# Altium PCB PT-MIS-PCB-004_v1.PcbDoc
Units mil, origin at the board's own origin, x right, y up, seen from the top; angles counter-clockwise.
Board outline 4318.93 x 4318.93 mil, 2 copper layers (Top Layer, Bottom Layer); 68 components, 28 nets, 205 pads, 82 vias.
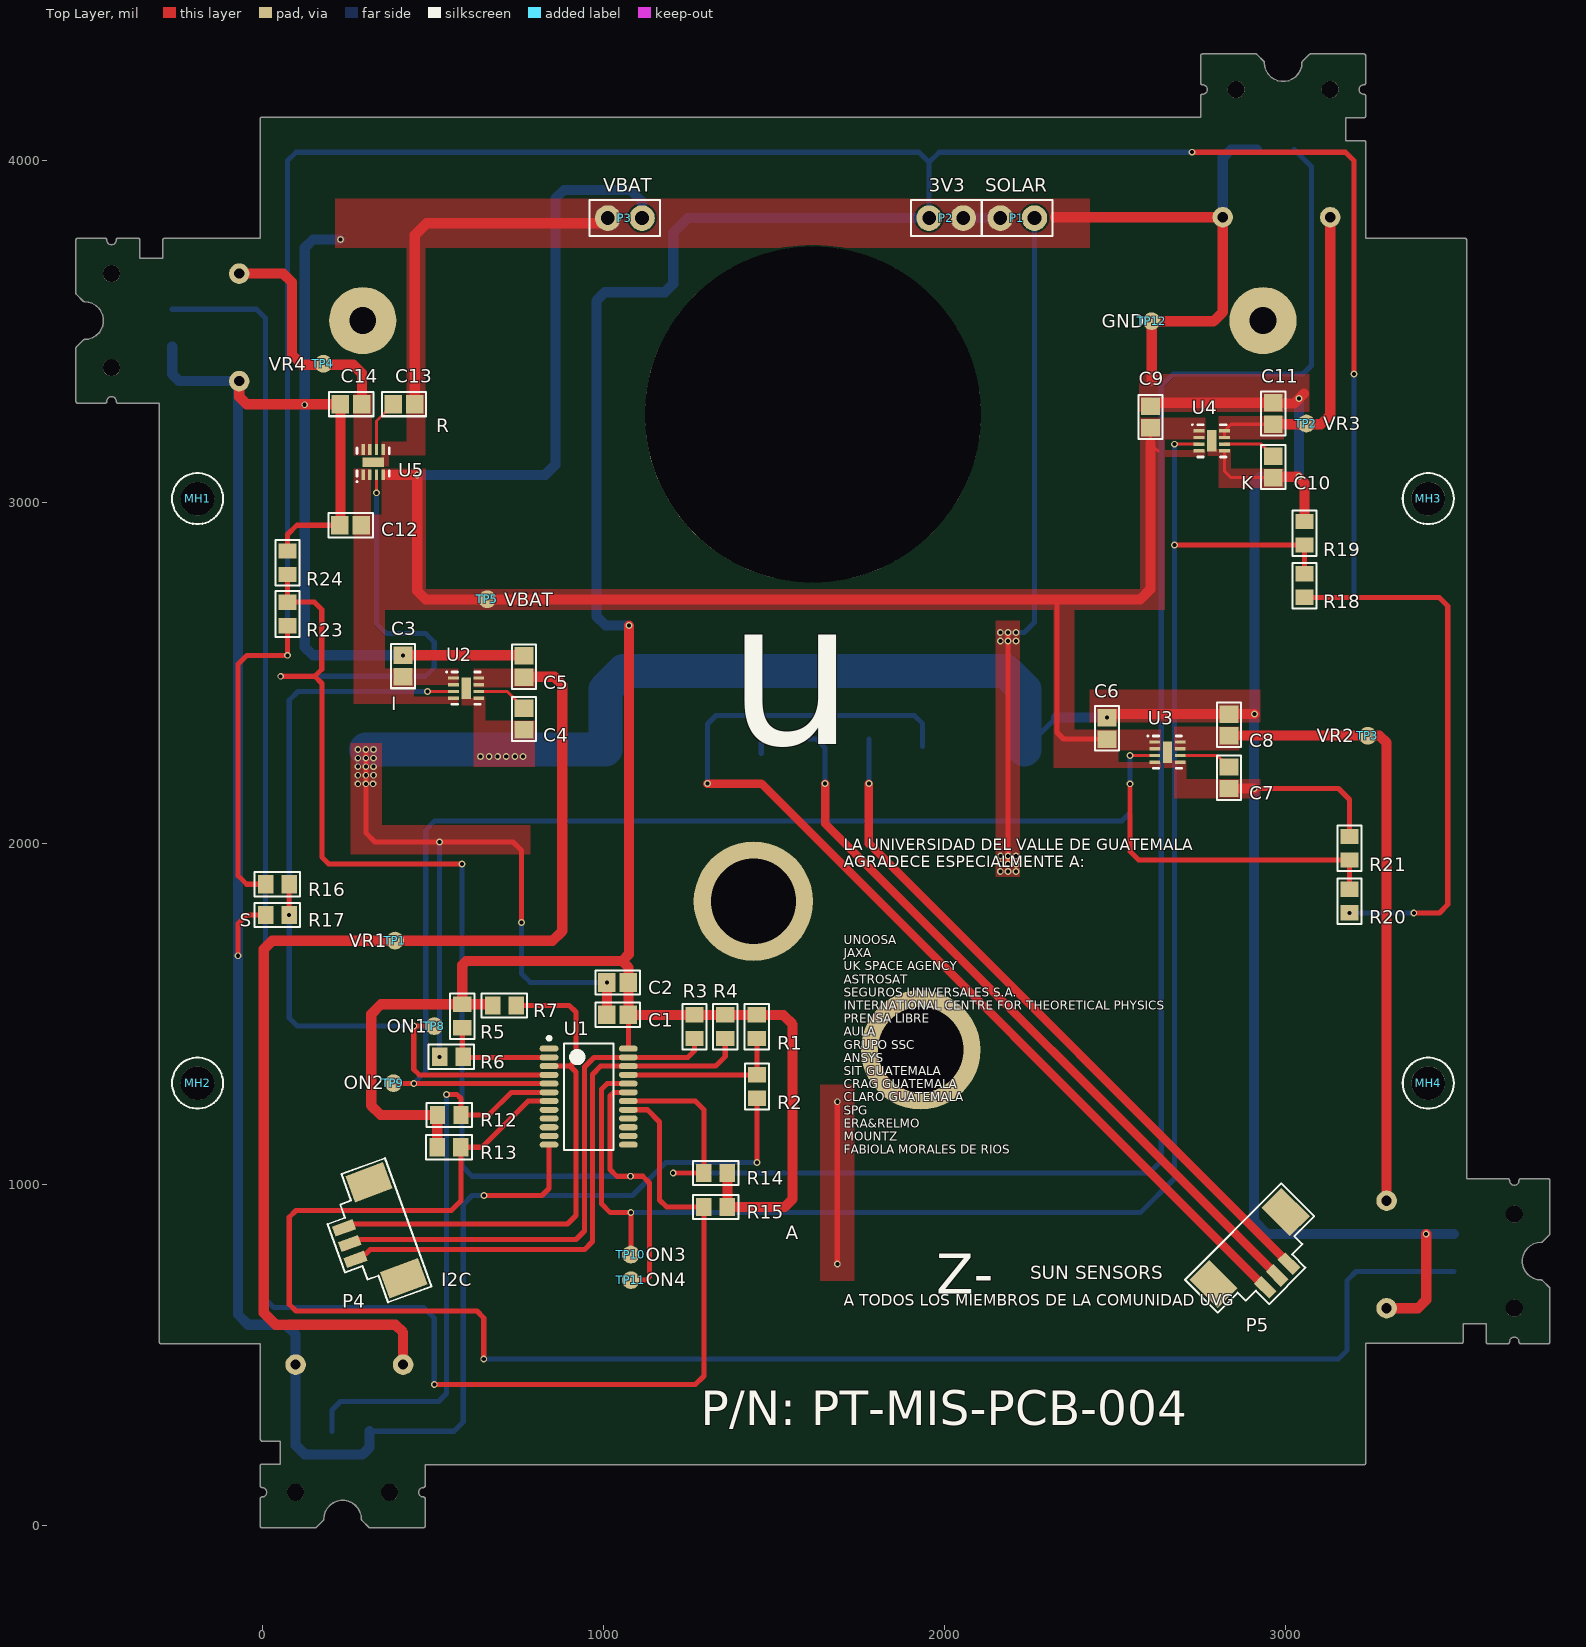
[diagram p0: Top Layer view]
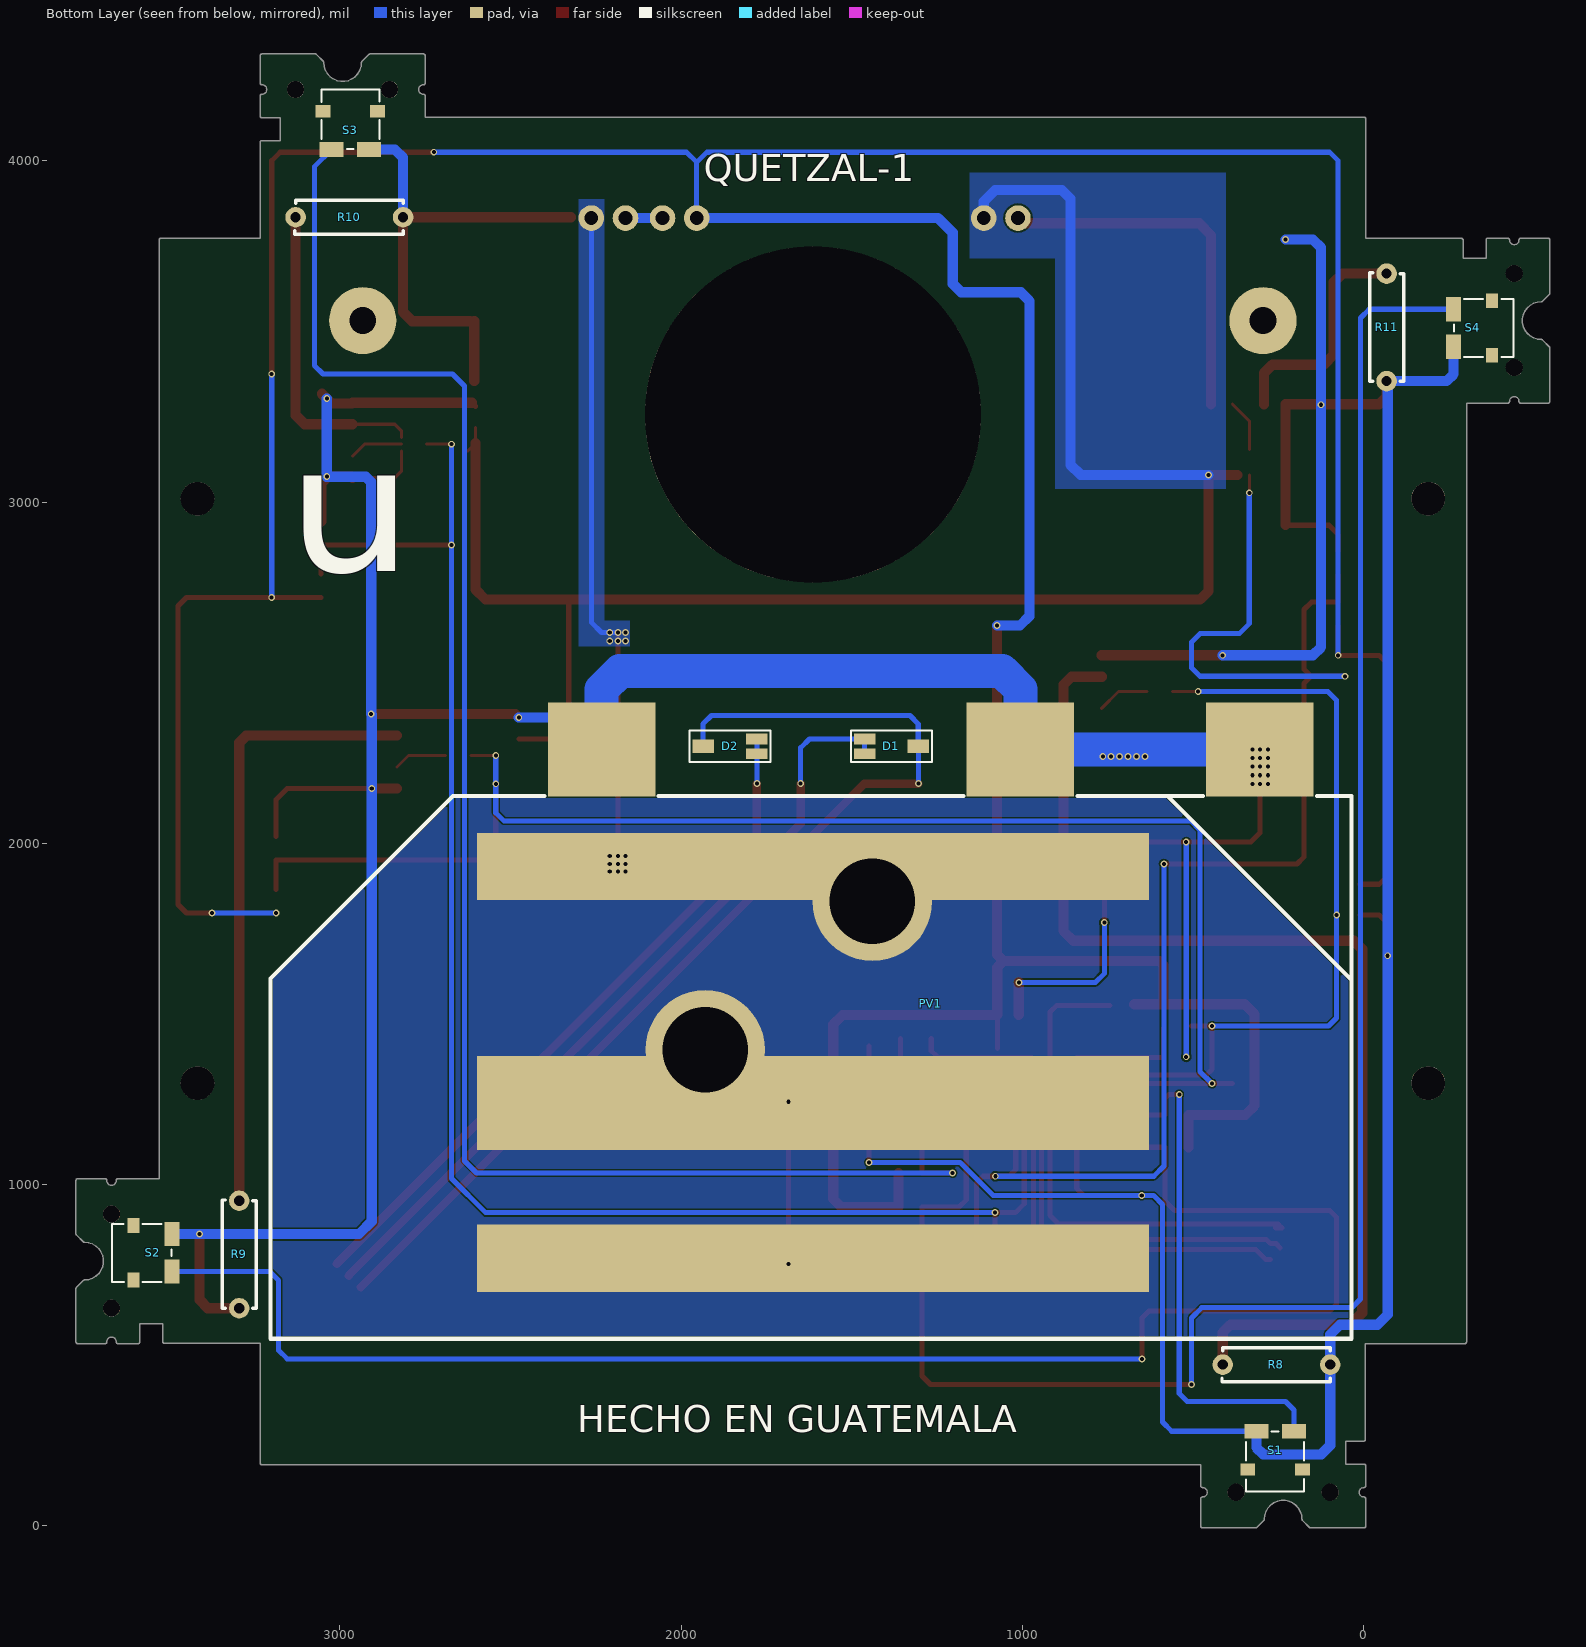
[diagram p1: Bottom Layer view, seen from below]
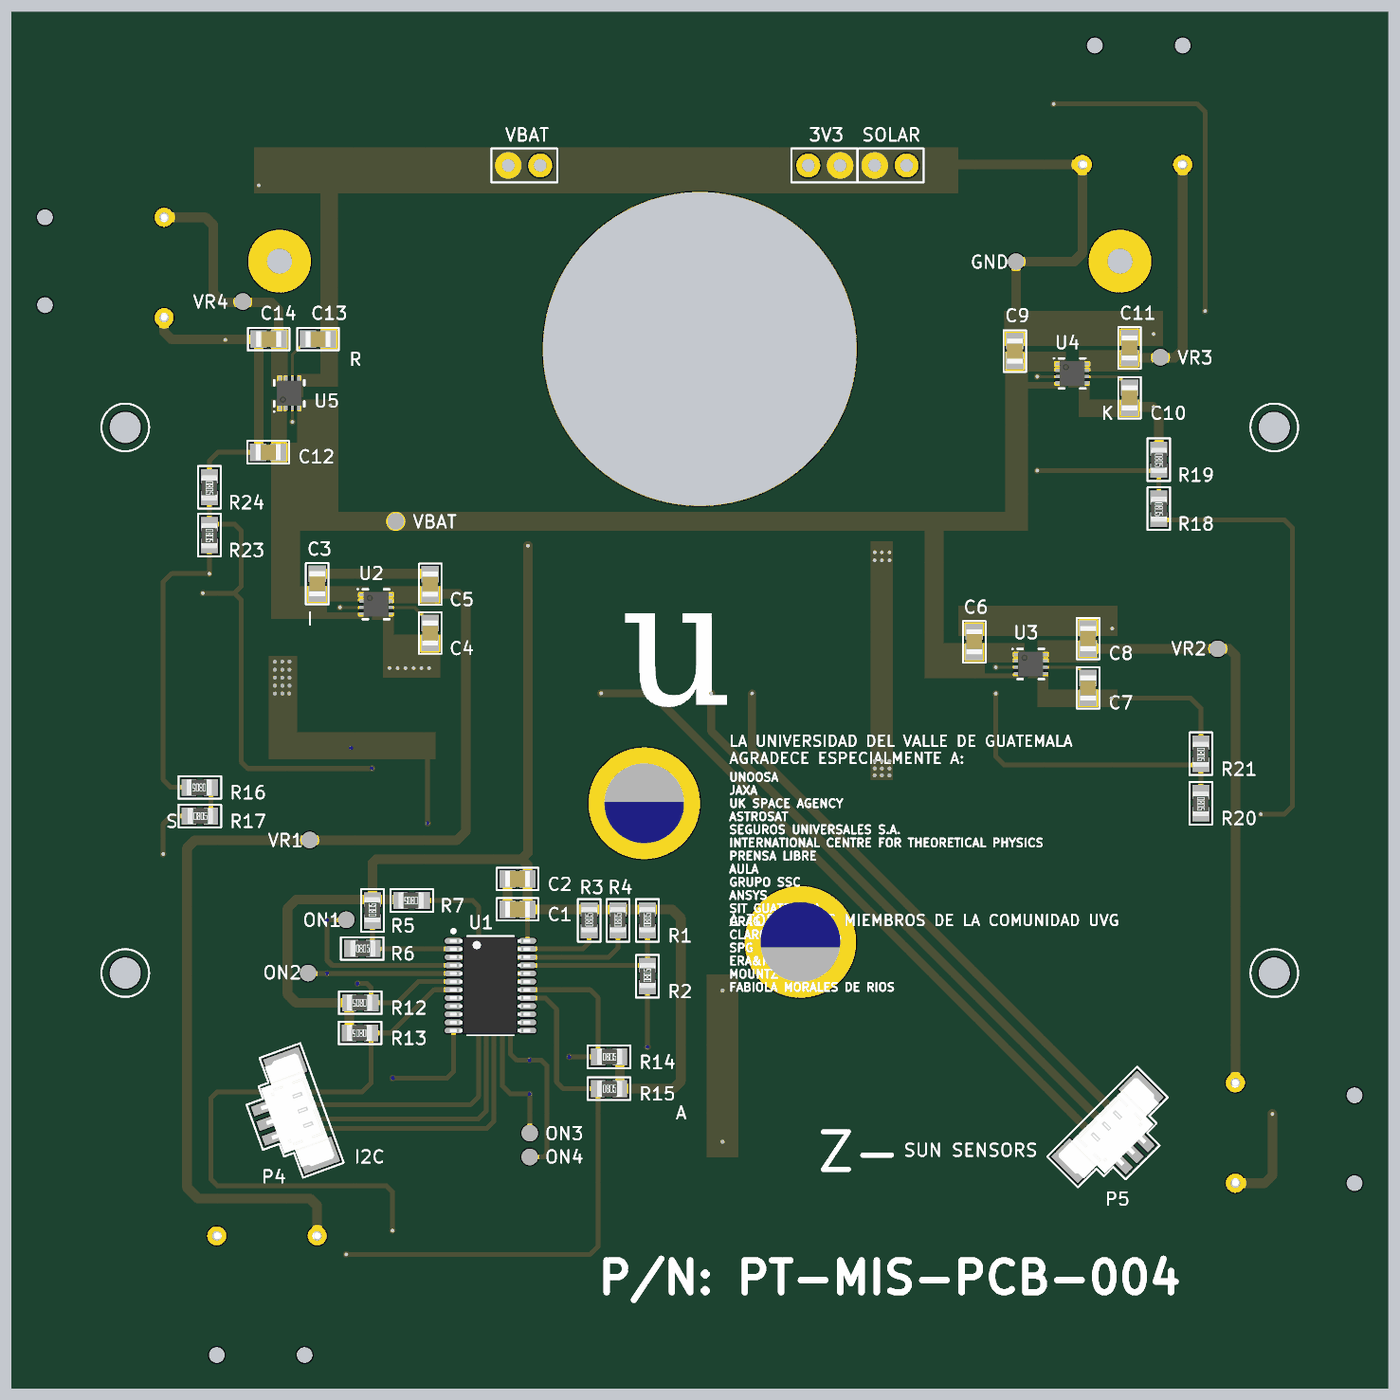
[diagram p2: 3D render of the assembled board from above, using the file's embedded part models]
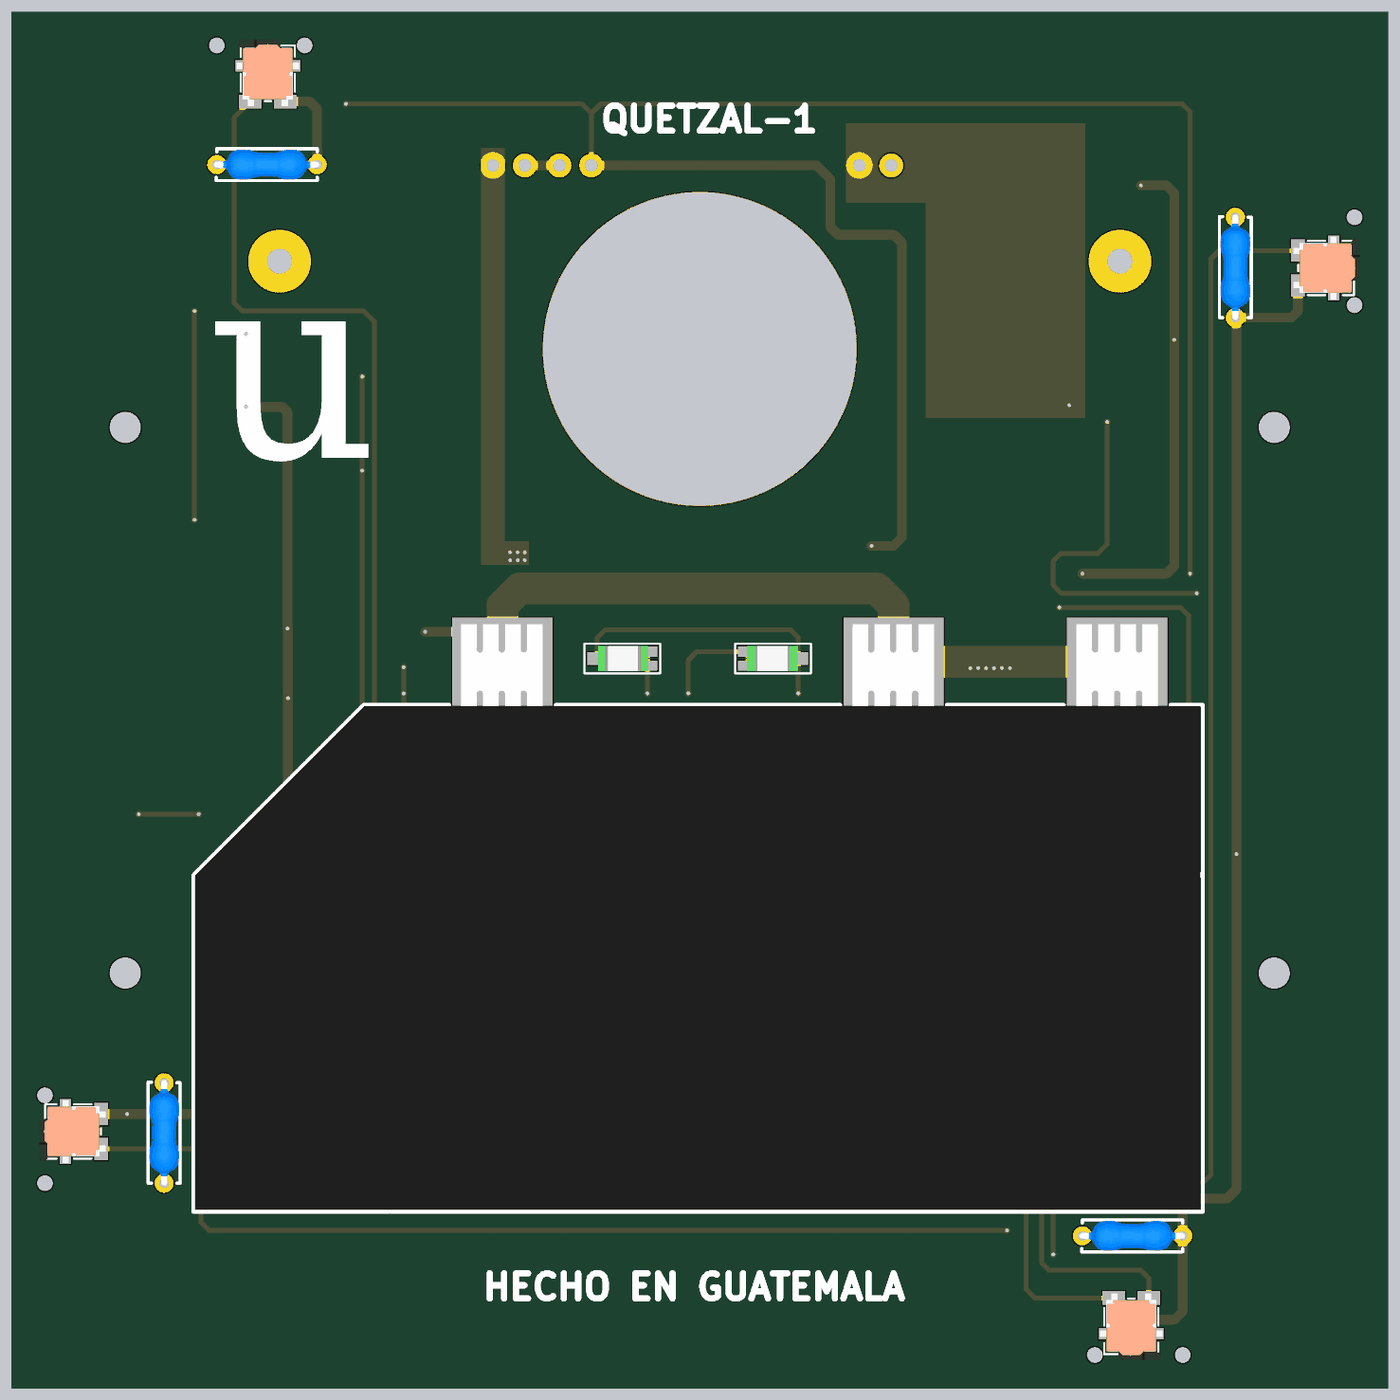
[diagram p3: 3D render of the assembled board from below, using the file's embedded part models]

## Layer stack, top to bottom
Top Solder: solder mask 0.4, Solder Resist, Dk 3.5
Top Layer: signal copper 1.4
Dielectric 1: dielectric 12.6, FR-4, Dk 4.8
Bottom Layer: signal copper 1.4
Bottom Solder: solder mask 0.4, Solder Resist, Dk 3.5

## Board outline
329 vertices, not listed, extent -545.29,-5.92 3773.64,4313.01

## Design rules (kind name [scope] priority, off if disabled: settings)
Clearance [All] p1: gap=5 ignorepadtopadclearanceinfootprint=FALSE
ComponentClearance [All] p1: gap=0 collisioncheckmode=3 verticalgap=0 showdistances=FALSE
HoleSize [All] p1: absolutevalues=TRUE maxlimit=984.25 minlimit=1 maxpercent=80.000 minpercent=20.000
HoleToHoleClearance [All] p1: gap=7.87 allowstackedmicrovias=TRUE
PlaneConnect [All] p1: planeconnectstyle=Direct reliefexpansion=20 reliefentries=4 reliefconductorwidth=10 reliefairgap=10
PolygonConnect [All] p1: connectstyle=Direct reliefconductorwidth=10 reliefentries=4 polygonreliefangle="90 Angle" airgapwidth=10
RoutingVias [All] p1: holewidth=28 width=50 viastyle="Through Hole" minholewidth=28 minwidth=50 maxholewidth=28 maxwidth=50
SolderMaskExpansion [All] p1: expansion=4
Width [All] p1: maxlimit=100 minlimit=5 preferedwidth=15
26 further rules are at their usual default settings.

## Components (designator, comment, footprint, x,y, rotation, side; value= is the part's Value field where it differs from the comment)
C1 "0.1µF" "CAP 0805/2012" 1042.22,1497.54 r0 top
C2 "LMK212BJ106KG-T" "CAP 0805/2012" 1042.22,1592.54 r0 top
C3 "LMK212BJ106KG-T" "CAP 0805/2012" 413.39,2519.29 r270 top
C4 "LMK212BJ106KG-T" "CAP 0805/2012" 768.07,2364.29 r270 top
C5 "GRM21BR61E226ME44L" "CAP 0805/2012" 768.07,2517.72 r270 top
C6 "LMK212BJ106KG-T" "CAP 0805/2012" 2475.85,2337.05 r270 top
C7 "LMK212BJ106KG-T" "CAP 0805/2012" 2833.07,2192.05 r270 top
C8 "GRM21BR61E226ME44L" "CAP 0805/2012" 2833.07,2347.05 r270 top
C9 "LMK212BJ106KG-T" "CAP 0805/2012" 2603.07,3249.29 r270 top
C10 "LMK212BJ106KG-T" "CAP 0805/2012" 2963.07,3102.8 r270 top
C11 "GRM21BR61E226ME44L" "CAP 0805/2012" 2963.07,3259.29 r270 top
C12 "LMK212BJ106KG-T" "CAP 0805/2012" 259.61,2932.09 r0 top
C13 "LMK212BJ106KG-T" "CAP 0805/2012" 416.1,3286.77 r0 top
C14 "GRM21BR61E226ME44L" "CAP 0805/2012" 261.1,3286.77 r0 top
D1 "TEMD6010FX01" TEMD6010FX01 1383.07,2284.29 r180 bottom
D2 "TEMD6010FX01" TEMD6010FX01 1858.07,2284.29 r0 bottom
MH1 "MH_3.8MMNC_2.5MMD" MH_3.8MMNC_2.5MMD_NON_COPPER_NPTH -188.98,3009.84 r0 top
MH2 "MH_3.8MMNC_2.5MMD" MH_3.8MMNC_2.5MMD_NON_COPPER_NPTH -188.98,1297.24 r0 top
MH3 "MH_3.8MMNC_2.5MMD" MH_3.8MMNC_2.5MMD_NON_COPPER_NPTH 3417.32,3009.84 r0 top
MH4 "MH_3.8MMNC_2.5MMD" MH_3.8MMNC_2.5MMD_NON_COPPER_NPTH 3417.32,1297.24 r0 top
P1 "61300211121" 61300211121 2213.35,3832.05 r180 top
P2 "61300211121" 61300211121 2004.72,3832.05 r0 top
P3 "61300211121" 61300211121 1063.35,3832.05 r180 top
P4 "0533980371" 0533980371 310.98,846.65 r110 top
P5 "0533980371" 0533980371 2934.17,773.82 r225 top
PV1 "AZUR SPACE 3G30A" "AZUR SPACE 3G30A" 1614.17,1239.37 r180 bottom
R1 "0" "RES 0805/2012" 1449.55,1462.56 r90 top
R2 "0" "RES 0805/2012" 1450,1287.52 r90 top
R3 "10K" "RES 0805/2012" 1267.22,1462.54 r90 top
R4 "10K" "RES 0805/2012" 1357.22,1462.54 r90 top
R5 "0" "RES 0805/2012" 586.83,1493.64 r90 top
R6 "0" "RES 0805/2012" 554.72,1374.37 r0 top
R7 "10K" "RES 0805/2012" 710,1525.04 r180 top
R8 "5.6" MFR50SFTE52-5R6 98.42,472.44 r0 bottom
R9 "5.6" MFR50SFTE52-5R6 3295.28,637.8 r90 bottom
R10 "5.6" MFR50SFTE52-5R6 2814.96,3834.65 r0 bottom
R11 "5.6" MFR50SFTE52-5R6 -66.93,3354.33 r90 bottom
R12 "10K" "RES 0805/2012" 548.62,1204.29 r180 top
R13 "10K" "RES 0805/2012" 548.07,1109.29 r180 top
R14 "10K" "RES 0805/2012" 1329.29,1034.29 r0 top
R15 "10K" "RES 0805/2012" 1329.29,934.29 r0 top
R16 "10K" "RES 0805/2012" 45,1880 r180 top
R17 "10K" "RES 0805/2012" 45,1790 r0 top
R18 "10K" "RES 0805/2012" 3055,2755 r270 top
R19 "10K" "RES 0805/2012" 3055,2908.52 r270 top
R20 "10K" "RES 0805/2012" 3186.85,1830.55 r270 top
R21 "10K" "RES 0805/2012" 3186.85,1985.55 r270 top
R23 "10K" "RES 0805/2012" 75,2672.09 r270 top
R24 "10K" "RES 0805/2012" 75,2822.09 r270 top
S1 "ESE-18L11C" ESE-18L11C 259.72,221.14 r0 bottom
S2 "ESE-18L11C" ESE-18L11C 3548.62,800.04 r90 bottom
S3 "ESE-18L11C" ESE-18L11C 2969.72,4088.94 r180 bottom
S4 "ESE-18L11C" ESE-18L11C -319.17,3510.04 r270 bottom
TP1 "Testpoint" Testpoint#1 390,1715 r0 top
TP2 "Testpoint" Testpoint#1 3060,3230 r90 top
TP3 "Testpoint" Testpoint#1 3240,2315 r90 top
TP4 "Testpoint" Testpoint#1 180,3405 r90 top
TP5 "Testpoint" Testpoint#1 660,2715 r90 top
TP8 "ON_1" Testpoint#2 105.28,2444.92 r90 top
TP9 "ON_2" Testpoint#1 385,1297.24 r90 top
TP10 "ON_3" Testpoint#1 1080.63,795 r90 top
TP11 "ON_4" Testpoint#3 1079.72,720 r90 top
TP12 "GND" Testpoint#1 2606.78,3530 r90 top
U1 "TCA9539QPWRQ1" TSOP65P640X120-24N 957.22,1257.54 r0 top
U2 "TPS22965TDSGRQ1" SON50P200X80_HS-9N 598.07,2454.76 r0 top
U3 "TPS22965TDSGRQ1" SON50P200X80_HS-9N 2653.07,2267.2 r0 top
U4 "TPS22965TDSGRQ1" SON50P200X80_HS-9N 2783.07,3179.29 r0 top
U5 "TPS22965TDSGRQ1" SON50P200X80_HS-9N 325.63,3116.77 r90 top

## Footprints (in the part's own frame and the unit in brackets; to place one, negate y for a bottom-side part, rotate by r counter-clockwise, add the part's x,y. Pads: shape width x height; smd on the part's side, far side on the other; paste and mask are expansions set on the pad)
0533980371 [mm] "CONN HEADER 3POS 1.25MM VERT SMD"
  rect 2.1x3 smd: 0(-3.8,-1.45) 0(3.8,-1.45)
  rect 0.8x1.6 smd: 1(-1.25,1.45) 2(0,1.45) 3(1.25,1.45)
  silkscreen extent -5.07,-3.18 5.07,2.53, body extent -4.45,-2.68 4.45,1.52, height 4.68
61300211121 [mil] "CONN HEADER 2 POS 2.54"
  round 75 hole 40: 1(-50,0) 2(50,0)
  silkscreen extent -103,-53 103,53
"AZUR SPACE 3G30A" [mm] "30% Triple Junction GaAs Solar Cell Assembly"
  rect 50x5 smd: 1(0,-11.557) 1(0,17.602)
  rect 50x7 smd: 1(0,0)
  rect 8x7 smd: 2(-15.727,26.297) 2(15.448,26.297) 3(33.273,26.297)
  silkscreen extent -40.38,-17.55 40.1,22.85, body extent -40.25,-17.41 39.9,29.27, height 0.31
"CAP 0805/2012" [mm]
  rect 1.3x1.4 smd: 1(-0.8,0) 2(0.8,0)
  silkscreen extent -1.65,-0.9 1.65,0.9, body extent -1,-0.64 1,0.64, height 1.26
ESE-18L11C [mm]
  rect 1.8x1.1 smd: 1(-1.397,-1.425) 2(1.397,-1.425)
  rect 1.1x0.9 smd: 3(-2.032,1.425) 4(2.032,1.425)
  silkscreen extent -2.16,-1.4 2.16,3.05, body extent -2.5,-1.78 2.5,3.52, height 1.26
MFR50SFTE52-5R6 [mil]
  round 60 hole 30: 1(0,0) 2(314.96,0)
  silkscreen extent 0,-50 317,50, body extent -10,-47 327,47, height 87
MH_3.8MMNC_2.5MMD_NON_COPPER_NPTH [mm] "Mounting Hole 3.8mm Diameter (Non Copper), 2.5mm Drill NPTH"
  round 2.5 hole 2.5 unplated: 1(0,0)
  silkscreen extent -1.9,-1.9 1.9,1.9
"RES 0805/2012" [mm]
  rect 1.15x1.35 smd: 1(-0.875,0) 2(0.875,0)
  silkscreen extent -1.7,-0.9 1.7,0.9, body extent -0.95,-0.62 1.05,0.63, height 0.6
SON50P200X80_HS-9N [mm] "SON, 8-Leads, Body 2.00x2.00mm, Pitch 0.50mm, Thermal Pad 1.60x0.69mm, IPC Medium Density"
  rect 0.8x0.25 smd: 1(-0.945,0.75) 2(-0.945,0.25) 3(-0.945,-0.25) 4(-0.945,-0.75) 5(0.945,-0.75) 6(0.945,-0.25) 7(0.945,0.25) 8(0.945,0.75)
  rect 0.69x1.6 smd: 9(0,0)
  silkscreen extent -1.5,-1.2 1.05,1.25, body extent -1,-1 1,1, height 0.78
TEMD6010FX01 [mm]
  rect 1.6x0.8 smd: 1(-2.025,-0.55) 1(-2.025,0.55)
  rect 1.6x1 smd: 2(1.975,0)
  silkscreen extent -3.05,-1.17 3,1.18, body extent -2.07,-1 1.93,1, height 1.01
Testpoint#1 [mil]
  round 52 smd: 1(0,0)
Testpoint#2 [mil]
  round 52 smd: 1(-980.55,-399.45)
Testpoint#3 [mil]
  round 52 smd: 1(0,-0.91)
TSOP65P640X120-24N [mm]
  oval 1.4x0.45 smd: 1(-2.95,3.575) 2(-2.95,2.925) 3(-2.95,2.275) 4(-2.95,1.625) 5(-2.95,0.975) 6(-2.95,0.325) 7(-2.95,-0.325) 8(-2.95,-0.975) 9(-2.95,-1.625) 10(-2.95,-2.275) 11(-2.95,-2.925) 12(-2.95,-3.575) 13(2.95,-3.575) 14(2.95,-2.925) 15(2.95,-2.275) 16(2.95,-1.625) 17(2.95,-0.975) 18(2.95,-0.325) 19(2.95,0.325) 20(2.95,0.975) 21(2.95,1.625) 22(2.95,2.275) 23(2.95,2.925) 24(2.95,3.575)
  silkscreen extent -3.07,-3.95 1.85,4.47, body extent -3.22,-3.9 3.17,3.9, height 1.2

## Part data
C1: library part C0805C104Z3VACTU, "Multilayer Ceramic Capacitors MLCC - SMD/SMT 25volts 0.1uF Y5V -20+80%", Capacitance="0.1 uF", Capacitance - nF="100 nF", Capacitance - pF="100000 pF", Case Code - in=0805, Case Code - mm=2012, Case Height="0.9 mm", Case Length="2 mm", Case Width="1.2 mm", Dielectric=Y5V, Manufacturer=KEMET, Maximum Operating Temperature="+ 85 C", Minimum Operating Temperature="- 30 C", Operating Temperature Range="- 30 C to + 85 C", Package / Case="0805 (2012 metric)", Supplier Part Number 1=399-9158-1-ND, Temperature Coefficient / Code="- 82 %, + 22 %", Tolerance="- 20 %, + 80 %", Voltage Rating="25 V", Brand=Kemet, Class=3, ComponentLink1Description=http://www.farnell.com/datasheets/2112180.pdf, ComponentLink1URL=http://www.farnell.com/datasheets/2112180.pdf, ComponentLink2Description=http://www.mouser.com/ds/2/212/KEM_C1005_Y5V_SMD-1101305.pdf, ComponentLink2URL=http://www.mouser.com/ds/2/212/KEM_C1005_Y5V_SMD-1101305.pdf, ComponentLink3Description=https://search.kemet.com/component-edge/download/datasheet/C0805C104Z3VACTU.pdf, ComponentLink3URL=https://search.kemet.com/component-edge/download/datasheet/C0805C104Z3VACTU.pdf, ComponentLink4Description=http://capacitoredge.kemet.com/capedge2/DataSheet?pn=C0805C104Z3VACTU, ComponentLink4URL=http://capacitoredge.kemet.com/capedge2/DataSheet?pn=C0805C104Z3VACTU, ComponentLink5Description=http://components.arrow.com/part/dataview/2091117S3443012N7429, ComponentLink5URL=http://components.arrow.com/part/dataview/2091117S3443012N7429, Dimensions="1.2 mm W x 2 mm L x 0.9 mm H", Dissipation Factor DF=7, Factory Pack Quantity=4000, Lead Spacing="0.75 mm", Manufacturer Part Number=C0805C104Z3VACTU, Packaging=Reel, Part # Aliases=C0805C104Z3VAC7800, Pricing 1="1=0.1, 10=0.065, 100=0.0289, 500=0.0207, 1000=0.0162 (USD)", Product="General Type MLCCs", Product Category="Multilayer Ceramic Capacitors MLCC - SMD/SMT", RoHS=Details, Series=C0805C, Stock 1=70310, Supplier 1=Digi-Key, Termination Style=SMD/SMT, Type="Y5V Dielectric, Commercial", Voltage Rating DC="25 V"
C2 C3 C4 C6 C7 C9 C10 C12 C13: "CAP CER 10UF 10V X5R 0805", Capacitance=10µF, Manufacturer="Taiyo Yuden", Operating Temperature="-55°C ~ 85°C", Package / Case="0805 (2012 Metric)", PCN Part Number="X5R, X7R Dielectrics 23/Jan/2008", Ratings=-, Standard Package=1, Supplier Part Number 1=587-1300-1-ND, Temperature Coefficient=X5R, Tolerance=±10%, Voltage - Rated=10V, Applications="General Purpose", Catalog Drawings="xMK Series_0805_1.25", Category=Capacitors, ComponentLink1Description=https://datasheet.ciiva.com/26872/getdatasheetpartid-638410-26872692.pdf, ComponentLink1URL=https://datasheet.ciiva.com/26872/getdatasheetpartid-638410-26872692.pdf, ComponentLink2Description=https://datasheet.ciiva.com/7975/1497285-7975797.pdf, ComponentLink2URL=https://datasheet.ciiva.com/7975/1497285-7975797.pdf, ComponentLink3Description=https://datasheet.ciiva.com/7975/1497285-7975799.pdf, ComponentLink3URL=https://datasheet.ciiva.com/7975/1497285-7975799.pdf, ComponentLink4Description=https://datasheet.ciiva.com/135/mlcc-all-e-135133.pdf, ComponentLink4URL=https://datasheet.ciiva.com/135/mlcc-all-e-135133.pdf, ComponentLink5Description=https://datasheet.ciiva.com/135/mlcc-all-e-135134.pdf, ComponentLink5URL=https://datasheet.ciiva.com/135/mlcc-all-e-135134.pdf, ComponentLink6Description=https://datasheet.ciiva.com/30259/719lmk212abj106kg-t-30259022.pdf, ComponentLink6URL=https://datasheet.ciiva.com/30259/719lmk212abj106kg-t-30259022.pdf, ComponentLink7Description=https://datasheet.ciiva.com/135/mlcc-all-e-135135.pdf, ComponentLink7URL=https://datasheet.ciiva.com/135/mlcc-all-e-135135.pdf, Family="Ceramic Capacitors", Featured Product="Multilayer Chip Capacitors", Features=-, Height - Seated (Max)=-, Kits="587-1797-KIT-ND  - KIT CAP CER HI CAP 0603 & 0805 S", Lead Spacing=-, Lead Style=-, Manufacturer Part Number=LMK212BJ106KG-T, Mounting Type="Surface Mount, MLCC", Online Catalog="M Series", Other Names=587-1300-1, Packaging="Cut Tape (CT)", Pricing 1="1=0.14, 10=0.1, 100=0.0468, 500=0.0328, 1000=0.0272 (USD)", Series=M, Size / Dimension="0.079\" L x 0.049\" W (2.00mm x 1.25mm)", Stock 1=858762, Supplier 1=Digi-Key, Thickness (Max)="0.053\" (1.35mm)"
C5 C8 C11 C14: "MURATA         GRM21BR61E226ME44L             SMD Multilayer Ceramic Capacitor, 0805 [2012 Metric], 22 F, 25 V,  20%, X5R, GRM Series", Capacitance="22 uF", Case Code - in=0805, Case Code - mm=2012, Dielectric=X5R, Manufacturer=Murata, Maximum Operating Temperature="+ 85 C", Minimum Operating Temperature="- 55 C", Package / Case="0805 (2012 metric)", Supplier Part Number 1=490-10749-1-ND, Tolerance="20 %", Voltage Rating DC="25 VDC", Brand="Murata Electronics", Class="Class 2", ComponentLink1Description=https://datasheet.ciiva.com/22787/1747471-22787265.pdf, ComponentLink1URL=https://datasheet.ciiva.com/22787/1747471-22787265.pdf, ComponentLink2Description=https://datasheet.ciiva.com/7719/1747471-7719095.pdf, ComponentLink2URL=https://datasheet.ciiva.com/7719/1747471-7719095.pdf, ComponentLink3Description=https://datasheet.ciiva.com/28584/1747471-28584199.pdf, ComponentLink3URL=https://datasheet.ciiva.com/28584/1747471-28584199.pdf, Factory Pack Quantity=3000, Height="1.25 mm", Length="2 mm", Manufacturer Part Number=GRM21BR61E226ME44L, Packaging=Reel, Pricing 1="1=0.46, 10=0.316, 100=0.1898, 500=0.1423, 1000=0.1202 (USD)", Product="General Type MLCCs", Product Category="Multilayer Ceramic Capacitors MLCC - SMD/SMT", RoHS=True, Series=GRM, Stock 1=146, Supplier 1=Digi-Key, Termination Style=SMD/SMT, Type="General Purpose Ceramic Capacitors", Unit Weight="0.000335 oz", Width="1.25 mm"
D1 D2: "Ambient Light Sensor", Current - Dark (Typ)=2nA, Manufacturer="Vishay Semiconductors", Operating Temperature="-40°C ~ 100°C", Standard Package=3,000, Supplier Part Number 1=751-1051-1-ND, Voltage - DC Reverse (Vr) (Max)=16V, Active Area=0.27mm², Catalog Drawings=TEMx60x0(F)X01, Category="Sensors, Transducers", ComponentLink1Description=https://datasheet.ciiva.com/8280/temd6010-8280593.pdf, ComponentLink1URL=https://datasheet.ciiva.com/8280/temd6010-8280593.pdf, ComponentLink2Description=https://datasheet.ciiva.com/1252/temd6010-1252130.pdf, ComponentLink2URL=https://datasheet.ciiva.com/1252/temd6010-1252130.pdf, ComponentLink3Description=https://datasheet.ciiva.com/2819/temd6010-2819730.pdf, ComponentLink3URL=https://datasheet.ciiva.com/2819/temd6010-2819730.pdf, ComponentLink4Description=https://datasheet.ciiva.com/2819/temd6010-2819731.pdf, ComponentLink4URL=https://datasheet.ciiva.com/2819/temd6010-2819731.pdf, ComponentLink5Description=https://datasheet.ciiva.com/2819/temd6010-2819732.pdf, ComponentLink5URL=https://datasheet.ciiva.com/2819/temd6010-2819732.pdf, ComponentLink6Description=https://datasheet.ciiva.com/4270/temd6010-4270070.pdf, ComponentLink6URL=https://datasheet.ciiva.com/4270/temd6010-4270070.pdf, ComponentLink7Description=https://datasheet.ciiva.com/46430/1794172-46430214.pdf, ComponentLink7URL=https://datasheet.ciiva.com/46430/1794172-46430214.pdf, ComponentLink8Description=https://datasheet.ciiva.com/1249/temd6010-1249179.pdf, ComponentLink8URL=https://datasheet.ciiva.com/1249/temd6010-1249179.pdf, ComponentLink9Description=https://datasheet.ciiva.com/4697/temd6010-102586-4697659.pdf, ComponentLink9URL=https://datasheet.ciiva.com/4697/temd6010-102586-4697659.pdf, Diode Type=PIN, Family="Optical Sensors - Photodiodes", Featured Product="Surface-Mount Ambient Light Sensing Photodiodes", Manufacturer Part Number=TEMD6010FX01, Mounting Type="Surface Mount", Online Catalog="Ambient Light Sensor", Other Names=751-1051-2, Packaging="Tape & Reel (TR)", Pricing 1="1=2.26, 10=1.998, 25=1.4824, 100=1.2892, 250=1.1603, 500=1.0314, 1000=0.8863 (USD)", Product Training Modules="Ambient Light Sensors", Spectral Range="430nm ~ 610nm", Stock 1=29, Supplier 1=Digi-Key, Viewing Angle=120°, Wavelength=540nm
MH1 MH2 MH3 MH4: library part MH_3.8MMNC_2MMD, "Mounting Hole 3.8mm Diameter (Non Copper), 2.5mm Drill NPTH"
P1 P2 P3: "Headers & Wire Housings WR-PHD 2.54mm Header 2P THT", Colour=Black, Current Rating=3A, Manufacturer="Wurth Electronics", Max Operating Temperature=125°C, Min Operating Temperature=-40°C, Supplier Part Number 1=732-5315-ND, Voltage Rating=250V, ComponentLink1Description=https://datasheet.ciiva.com/13619/6130xx11121-48870-13619345.pdf, ComponentLink1URL=https://datasheet.ciiva.com/13619/6130xx11121-48870-13619345.pdf, Connector Type="Male Pin", Contact Gender=Male, Contact Material="Copper,Copper Alloy", Contact Mating Length=0.236inch, Contact Plating=Gold, Gender=Male, Housing Material=PBT, Lead Free="Lead Free", Manufacturer Part Number=61300211121, Mount="Through Hole", Number of Contacts=2, Number of Positions=2, Number of Rows=1, Packaging=Bulk, Pitch=0.1inch, Pricing 1="1=0.13, 10=0.106, 25=0.088, 50=0.074, 100=0.067, 1000=0.061 (USD)", REACH SVHC=Unknown, Stock 1=98753, Supplier 1=Digi-Key, Termination="Through Hole"
P4 P5: "3 Positions Header, Shrouded Connector 0.049\" (1.25mm) Surface Mount, Vertical Tin", Color=Natural, Manufacturer=Molex, Supplier Part Number 1=WM7607CT-ND, Category="Connectors, Interconnects", ComponentLink1Description=https://datasheet.ciiva.com/6813/533980271-sd-6813860.pdf, ComponentLink1URL=https://datasheet.ciiva.com/6813/533980271-sd-6813860.pdf, ComponentLink2Description=https://datasheet.ciiva.com/3117/0533980371-pcb-headers-3117626.pdf, ComponentLink2URL=https://datasheet.ciiva.com/3117/0533980371-pcb-headers-3117626.pdf, ComponentLink3Description=https://datasheet.ciiva.com/3117/0533980371-pcb-headers-3117627.pdf, ComponentLink3URL=https://datasheet.ciiva.com/3117/0533980371-pcb-headers-3117627.pdf, Connector Type="Header, Shrouded", Contact Finish=Tin, Contact Finish Thickness="39µin (1.00µm)", Contact Mating Length=-, Contact Type="Blade Pin", Family="Rectangular Connectors - Headers, Male Pins", Fastening Type=-, Features="Solder Retention", Manufacturer Part Number=0533980371, Mounting Type="Surface Mount", Number of Positions=3, Number of Positions Loaded=All, Number of Rows=1, Packaging=Digi-Reel®, Pitch="0.049\" (1.25mm)", Pricing 1="1=1.07, 10=0.942, 100=0.8126, 500=0.6649 (USD)", Row Spacing=-, Series="PicoBlade™ 53398", Stock 1=26974, Supplier 1=Digi-Key, Termination=Solder
PV1: "30% Triple Junction GaAs Solar Cell Assembly", Current at max. Power="502.9 mA", Voltage at max.Power="2409 mV", Average Efficiency (1353 W/m^2)=29.6, Average Efficiency (1367 W/m^2)=29.3, Average Open Circuit (BOL)="2690 mV", Average Short Circuit (BOL)="519.6 mA"
R1 R2 R5 R6: library part RC0805JR-070RL, "YAGEO         RC0805JR-070RL             RES, THICK FILM, 0R, 0.125W, 0805", Case/Package=0805, Case Code (Metric)=2012, Manufacturer=Yageo, Max Operating Temperature=155°C, Min Operating Temperature=-55°C, Power Rating=125mW, Resistance=0mR, Supplier Part Number 1=311-0.0ARDKR-ND, Temperature Coefficient=200ppm/°C, Tolerance=5%, Voltage Rating=150V, Case Code (Imperial)=0805, ComponentLink1Description=https://datasheet.ciiva.com/7941/1738694-7941861.pdf, ComponentLink1URL=https://datasheet.ciiva.com/7941/1738694-7941861.pdf, ComponentLink2Description=https://datasheet.ciiva.com/7941/1738694-7941862.pdf, ComponentLink2URL=https://datasheet.ciiva.com/7941/1738694-7941862.pdf, ComponentLink3Description=https://datasheet.ciiva.com/11819/0900766b8106beab-11819430.pdf, ComponentLink3URL=https://datasheet.ciiva.com/11819/0900766b8106beab-11819430.pdf, ComponentLink4Description=https://datasheet.ciiva.com/7941/1738694-7941863.pdf, ComponentLink4URL=https://datasheet.ciiva.com/7941/1738694-7941863.pdf, ComponentLink5Description=https://datasheet.ciiva.com/15190/getdatasheetpartid-330685-15190028.pdf, ComponentLink5URL=https://datasheet.ciiva.com/15190/getdatasheetpartid-330685-15190028.pdf, Composition="Thick Film", Contact Plating=Tin,Matte, Depth=1.25mm, Height=0.5mm, Lead Free="Lead Free", Length=2mm, Manufacturer Part Number=RC0805JR-070RL, Military Standard=Not, Number of Pins=2, Packaging="Tape and Reel", Pricing 1="1=0.1, 10=0.046, 25=0.0332, 50=0.0254, 100=0.0188, 250=0.01432, 500=0.01144, 1000=0.00842 (USD)", Radiation Hardening=No, REACH SVHC=Unknown, Stock 1=3499825, Supplier 1=Digi-Key, Termination=SMD/SMT, Voltage Rating (DC)=150V, Width=1.25mm
R3 R4 R7 R12 R13 R14 R15 R16 R17 R18 R19 R20 R21 R23 R24: library part RC0805FR-0710KL, "RES SMD 10K OHM 1% 1/8W 0805", Case Code - in=0805, Case Code - mm=2012, Manufacturer=Yageo, Operating Temperature Range="- 55 C to + 155 C", Power Rating="125 mW (1/8 W)", Resistance="10 kOhms", Supplier Part Number 1=311-10.0KCRCT-ND, Temperature Coefficient="100 PPM / C", Tolerance="1 %", Voltage Rating="150 V", ComponentLink1Description=https://datasheet.ciiva.com/11808/0900766b8106beab-11808151.pdf, ComponentLink1URL=https://datasheet.ciiva.com/11808/0900766b8106beab-11808151.pdf, ComponentLink2Description=https://datasheet.ciiva.com/12669/rc0805-12669688.pdf, ComponentLink2URL=https://datasheet.ciiva.com/12669/rc0805-12669688.pdf, ComponentLink3Description=https://datasheet.ciiva.com/46447/444164-46447563.pdf, ComponentLink3URL=https://datasheet.ciiva.com/46447/444164-46447563.pdf, ComponentLink4Description=https://datasheet.ciiva.com/2456/pyu-r-int-thick-7-2456972.pdf, ComponentLink4URL=https://datasheet.ciiva.com/2456/pyu-r-int-thick-7-2456972.pdf, ComponentLink5Description=https://datasheet.ciiva.com/2456/pyu-r-int-thick-7-2456973.pdf, ComponentLink5URL=https://datasheet.ciiva.com/2456/pyu-r-int-thick-7-2456973.pdf, ComponentLink6Description=https://datasheet.ciiva.com/2456/pyu-r-int-thick-7-2456974.pdf, ComponentLink6URL=https://datasheet.ciiva.com/2456/pyu-r-int-thick-7-2456974.pdf, ComponentLink7Description=https://datasheet.ciiva.com/16747/rc0805-16747087.pdf, ComponentLink7URL=https://datasheet.ciiva.com/16747/rc0805-16747087.pdf, Manufacturer Part Number=RC0805FR-0710KL, Packaging=Reel, Pricing 1="1=0.1, 10=0.022, 100=0.0088, 1000=0.004, 2500=0.0034 (USD)", Product="Thick Film Resistors General Purpose", Series=RC, Stock 1=19355771, Supplier 1=Digi-Key, Termination Style=SMD/SMT
R8 R9 R10 R11: library part MFR50SFTE52-5R6, "Metal Film Resistors - Through Hole 5.6 OHM 1/2W 1%", Case/Package=Metal, Manufacturer=Yageo, Max Operating Temperature=155°C, Min Operating Temperature=-55°C, Power Rating=500mW, Resistance=5.6R, Supplier Part Number 1=603-MFR50SFTE52-5R6, Tolerance=1%, Voltage Rating=300V, ComponentLink1Description=http://www.mouser.com/ds/2/447/Yageo%20LR_MFR_2013-467719.pdf, ComponentLink1URL=http://www.mouser.com/ds/2/447/Yageo%20LR_MFR_2013-467719.pdf, Manufacturer Part Number=MFR50SFTE52-5R6, Packaging="Ammo Pack", Pricing 1="1=0.23, 10=0.14, 50=0.14, 100=0.046, 1000=0.032, 10000=0.023 (USD)", Stock 1=6192, Supplier 1=Mouser, Termination=Axial, Voltage Rating (DC)=300V
S1 S2 S3 S4: "Detector switch,SMT,SPNO,1HL,no boss", Current Rating="10mA (DC)", Manufacturer="Panasonic ECG", Operating Force, Torque=30gf, Operating Position="0.102\" (2.6mm)", Operating Temperature="-10°C ~ 60°C", Standard Package=1, Supplier Part Number 1=P14172SCT-ND, Voltage Rating - AC=-, Voltage Rating - DC=5V, 3D Model="ESE18 Series.stp", Actuator Type="Angled Toggle (Detector)", Catalog Drawings="ESE-18L61_F Footprint ESE-18L61_F Circuit NO ESE-18L61_F", Category=Switches, Circuit=SPST-NO, ComponentLink1Description=https://datasheet.ciiva.com/2890/atb0000ce10-2890776.pdf, ComponentLink1URL=https://datasheet.ciiva.com/2890/atb0000ce10-2890776.pdf, ComponentLink2Description=https://datasheet.ciiva.com/2890/atb0000ce10-2890777.pdf, ComponentLink2URL=https://datasheet.ciiva.com/2890/atb0000ce10-2890777.pdf, ComponentLink3Description=https://datasheet.ciiva.com/2890/atb0000ce10-2890778.pdf, ComponentLink3URL=https://datasheet.ciiva.com/2890/atb0000ce10-2890778.pdf, ComponentLink4Description=https://datasheet.ciiva.com/23620/1520574-23620267.pdf, ComponentLink4URL=https://datasheet.ciiva.com/23620/1520574-23620267.pdf, ComponentLink5Description=https://datasheet.ciiva.com/14143/ese18-eng-tds-14143212.pdf, ComponentLink5URL=https://datasheet.ciiva.com/14143/ese18-eng-tds-14143212.pdf, Differential Travel=-, Electrical Life="50,000 Cycles", Family="Snap Action, Limit Switches", Features=-, Ingress Protection=-, Manufacturer Part Number=ESE-18L11C, Mechanical Life="50,000 Cycles", Mounting Type="Surface Mount, Right Angle", Online Catalog="ESE18 Series", Other Names=P14172SDKR, Overtravel=-, Packaging=Digi-Reel®, Pretravel=-, Pricing 1="1=0.61, 10=0.578, 25=0.5544, 50=0.5314, 100=0.5082, 250=0.4042, 500=0.3696, 1000=0.3581 (USD)", Release Force=-, Series=ESE18, Stock 1=9120, Supplier 1=Digi-Key, Switch Function=Off-Mom, Termination Style="SMD (SMT) Tab"
TP8 TP9 TP10 TP11 TP12: library part Testpoint
U1: "Low Voltage 16-Bit I / 2C and SMBus Low-Power I/O Expander with Interrupt / Output, Reset Pin, and Configuration Registers", Case/Package=TSSOP, Frequency=400kHz, Manufacturer="Texas Instruments", Max Operating Temperature=125°C, Max Supply Voltage=3.6V, Min Operating Temperature=-40°C, Min Supply Voltage=1.65V, Supplier Part Number 1=296-44183-6-ND, ComponentLink1Description=http://www.ti.com/general/docs/lit/getliterature.tsp?genericPartNumber=TCA9539-Q1&&fileType=pdf, ComponentLink1URL=http://www.ti.com/general/docs/lit/getliterature.tsp?genericPartNumber=TCA9539-Q1&&fileType=pdf, ComponentLink2Description=http://www.ti.com/lit/pdf/sszc003, ComponentLink2URL=http://www.ti.com/lit/pdf/sszc003, ComponentLink3Description=http://www.ti.com/lit/ds/symlink/tca9539-q1.pdf, ComponentLink3URL=http://www.ti.com/lit/ds/symlink/tca9539-q1.pdf, ComponentLink4Description=http://www.ti.com/general/docs/lit/getliterature.tsp?genericPartNumber=TCA9539-Q1&amp;&amp;fileType=pdf, ComponentLink4URL=http://www.ti.com/general/docs/lit/getliterature.tsp?genericPartNumber=TCA9539-Q1&amp;&amp;fileType=pdf, Interface=I2C,SMBus, Lead Free="Lead Free", Manufacturer Part Number=TCA9539QPWRQ1, Mount="Surface Mount", Number of I/Os=16, Number of Outputs=16, Number of Pins=24, Packaging="Cut Tape", Pricing 1="1=1.62, 10=1.452, 100=1.1672, 500=0.95894, 1000=0.79454 (USD)", REACH SVHC="No SVHC", Stock 1=12145, Supplier 1=Digi-Key
U2 U3 U4 U5: "IC LOAD SWITCH 6A 8WSON", Current - Output (Max)=4A, Manufacturer="Texas Instruments", Operating Temperature="-40°C ~ 105°C (TA)", Package / Case="8-WFDFN Exposed Pad", Supplier Device Package="8-WSON (2x2)", Supplier Part Number 1=296-38290-1-ND, Voltage - Load="2.5 V ~ 5.5 V", Voltage - Supply (Vcc/Vdd)="0.8 V ~ 5.5 V", Category="Integrated Circuits (ICs)", ComponentLink1Description=http://components.arrow.com/part/dataview/66145051S825924N7713, ComponentLink1URL=http://components.arrow.com/part/dataview/66145051S825924N7713, ComponentLink2Description=http://www.ti.com/lit/gpn/tps22965-q1, ComponentLink2URL=http://www.ti.com/lit/gpn/tps22965-q1, ComponentLink3Description=http://www.ti.com/general/docs/lit/getliterature.tsp?genericPartNumber=TPS22965-Q1&&fileType=pdf, ComponentLink3URL=http://www.ti.com/general/docs/lit/getliterature.tsp?genericPartNumber=TPS22965-Q1&&fileType=pdf, ComponentLink4Description=http://www.ti.com/lit/pdf/ssay002, ComponentLink4URL=http://www.ti.com/lit/pdf/ssay002, Family="PMIC - Power Distribution Switches, Load Drivers", Fault Protection=-, Features="Load Discharge, Slew Rate Controlled", Input Type=Non-Inverting, Interface=On/Off, Manufacturer Part Number=TPS22965TDSGRQ1, Number of Outputs=1, Output Configuration="High Side", Output Type=N-Channel, Packaging="Tape & Reel (TR)", Pricing 1="1=0.89, 10=0.799, 100=0.623, 500=0.5147, 1000=0.4063 (USD)", Ratio - Input:Output=1:1, Rds On (Typ)="16 mOhm", Series="Automotive, AEC-Q100", Stock 1=10747, Supplier 1=Digi-Key, Supplier 2=Digi-Key, Supplier Part Number 2=751-1051-1-ND, Switch Type="General Purpose"

## Free pads (board coordinates)
  round 50 hole 50 unplated: 1(-440.95,3393.7) 1(-440.95,3669.29) 1(98.42,98.43) 1(374.02,98.43) 1(2854.33,4208.66) 1(3129.92,4208.66) 1(3669.29,637.8) 1(3669.29,913.39)
  round 196.85 hole 78.74: 1(295.28,3531.5) 1(2933.07,3531.5)
  round 984.25 hole 984.25: 1(1614.17,3255.91)
  round 350 hole 250: 2(1440,1830) 2(1930,1395)

## Via types
v1: diameter 20, hole 11.81, Top Layer to Bottom Layer, tented both sides, 82 vias

## Nets (pads, with @x,y where several pads share a name; then routed paths per layer and width w, separated by ;. In a path a pad name is that pad's centre, name@x,y a point inside that pad or via, vN(x,y) a via of type N, cw(c..) or ccw(c..) an arc to the next point about the centre after c; other vN are vias at no path point)
2V35: P1.1 pad.2 PV1.1 | length 2449.5
  Top Layer w15: v1(1685.63,767.72) v1(1685.63,1242.72) ; v1(2185.63,1917.72) v1(2185.63,2617.72)
  Bottom Layer w15: v1(2185.63,2617.72) 2233.33,2617.72 2263.35,2647.74 P1.1
  other v1: 2163.35,1917.72 2209.48,1917.72 2163.35,1939.37 2185.63,1939.37 2209.48,1939.37 2163.35,1962.72 2185.63,1962.72 2209.48,1962.72 2163.35,2592.72 2185.63,2592.72 2209.48,2592.72 2163.35,2617.72 2209.48,2617.72
3V3: C1.2 C2.2 P2.1 R1.2 R3.2 R4.2 R5.2 R7.2 R12.2 R13.2 R14.2 R15.2 R16.2 R18.2 R20.2 R23.2 U1.24 | length 14892.9
  Top Layer w15: R16.2 -45,1880 -70,1905 -70,2525 -44.21,2550.79 v1(75,2550.79) R23.2 ; R7.2@672.5,1528.09 R7.2 ; U1.24 1073.37,1497.19 C1.2 C1.2@1074.27,1496.99 ; v1(2725,4025) 3175,4025 3200,4000 v1(3200,3375) ; R18.2 3055.55,2720 v1(3200,2720) 3449.45,2720 3474.45,2695 3474.45,1820.55 3450,1796.1 v1(3375,1796.1)
  Top Layer w30: R13.2 513.62,1203.74 347.6,1203.74 320,1231.34 320,1499.53 348.56,1528.09 R5.2 ; R7.2@672.5,1528.09 R5.2 ; C1.2 C2.2 1073.72,1636.28 1055,1655 ; C1.2@1074.27,1496.99 R3.2 R4.2 R1.2 1527.09,1497.01 1554.72,1469.37 1554.72,957.76 1531.26,934.29 R15.2 R14.2 ; v1(1075,2638.09) 1075,1675 1055,1655 ; R5.2 586.83,1643.13 598.7,1655 1055,1655
  Bottom Layer w15: v1(75,2550.79) 75,4000 100,4025 1925,4025 1954.72,3995.28 ; P2.1 1954.72,3995.28 ; v1(2725,4025) 1984.45,4025 1954.72,3995.28 ; v1(3186.85,1796.1) v1(3375,1796.1) ; v1(3200,2720) v1(3200,3375)
  Bottom Layer w30: v1(1075,2638.09) 1007.24,2638.09 979.72,2665.61 979.72,3589.37 1004.72,3614.37 1179.72,3614.37 1204.72,3639.37 1204.72,3789.37 1247.4,3832.05 1938.35,3832.05 P2.1@1946.54,3823.86
GND: C1.1 C2.1 C3.1 C4.2 C5.1 C6.1 C7.2 C8.1 C9.1 C10.2 C11.1 C12.1 C13.2 C14.1 P1.2 P2.2 P3.2 PV1.2 PV1.3 R2.1 R6.1 R8.1 R9.1 R10.1 R11.1 R17.1 R19.1 R21.1 R24.1 S1.2 S2.2 S3.2 S4.2 TP12.1 U1.12 U2.5 U2.9 U3.5 U3.9 U4.5 U4.9 U5.5 U5.9 | length 21761.5
  Top Layer w9: U4.5 2820.28,3090.12 2839.09,3071.3 C10.2
  Top Layer w15: v1(-70,1670.55) -70,1765 -45,1790 R17.1 ; R24.1 75,2905 102.09,2932.09 C12.1 C12.1@229.61,2933.58 ; v1(304.19,2274.61) v1(304.19,2249.37) v1(304.19,2224.37) v1(304.19,2199.37) v1(304.19,2174.37) 304.19,2030.96 331.34,2003.82 v1(520.28,2003.82) 735.78,2003.82 760.27,1979.33 v1(760.27,1767.72) ; v1(650.63,967.72) 820.63,967.72 841.08,988.17 U1.12 ; v1(1450,1064.84) R2.1 ; v1(2475.85,2368.54) C6.1@2485.85,2378.54 ; C9.1 C9.1@2613.07,3290.79 ; v1(2906.85,2160.55) 3154.45,2160.55 3186.85,2128.15 R21.1
  Top Layer w30: R11.1 -66.93,3308.74 -44.96,3286.77 C14.1 C12.1@229.61,2933.58 ; v1(413.39,2550.79) C5.1@768.07,2550.79 ; C13.2 447.6,3782.24 482.4,3817.05 P3.2@1013.35,3817.05 ; C1.1 v1(1010.73,1592.54) ; 2323.6,3834.65 R10.1 2814.96,3556.61 2788.35,3530 TP12.1@2620,3530 ; C6.1@2485.85,2378.54 C8.1 v1(2908.35,2378.54) ; 2606.78,3355 TP12.1 ; C9.1@2613.07,3290.79 C11.1 2965,3288.86 3024.21,3288.86 v1(3038.5,3303.15) 3052.8,3317.44 ; C7.2 v1(2906.85,2160.55) ; C10.2 2966.14,3074.37 3035.63,3074.37 3055,3055 R19.1 ; R9.1 3387.09,637.8 3411.34,662.05 v1(3411.34,855.04)
  Bottom Layer w15: S1.2 562.6,277.24 589.72,304.37 589.72,941.81 615.63,967.72 v1(650.63,967.72) 1085.63,967.72 1182.75,1064.84 v1(1450,1064.84) ; v1(520.28,1374.37) v1(520.28,2003.82) ; v1(760.27,1767.72) 760.27,1618.08 785.81,1592.54 v1(1010.73,1592.54) ; PV1.2@2233.33,2274.67 PV1.2@2327.2,2368.54
  Bottom Layer w30: S4.2 -263.07,3374.88 -242.52,3354.33 R11.1 -70.28,3350.98 -70.28,619.37 -40.28,589.37 69.72,589.37 98.42,560.67 R8.1 98.42,235.67 124.72,209.37 294.72,209.37 314.72,229.37 S1.2 ; v1(229.72,3769.37) 149.37,3769.37 125,3745 v1(125,3285) 125,2575 149.21,2550.79 v1(413.39,2550.79) ; P2.2 P1.2 ; PV1.2@2327.2,2368.54 v1(2475.85,2368.54) ; R10.1 2814.96,4008.66 2839.13,4032.83 S3.2 ; v1@2906.85,2377.05 v1(2906.85,2160.55) 2906.85,892.25 2944.06,855.04 v1(3411.34,855.04) S2.2 ; v1(2908.35,2378.54) 2908.35,3058.35 2924.37,3074.37 v1(3038.5,3074.37) v1(3038.5,3303.15)
  Bottom Layer w100: v1(304.19,2274.61) 1005.96,2274.61 1005.96,2274.69 1005.96,2450.61 1059.72,2504.37 2179.72,2504.37 2233.33,2450.77 PV1.2@2233.33,2274.67
  other v1: 280.63,2174.37 325.63,2174.37 280.63,2199.37 326.44,2199.37 280.63,2224.37 326.44,2224.37 280.63,2249.37 326.44,2249.37 640.63,2254.37 665.63,2254.37 690.63,2254.37 715.63,2254.37 740.63,2254.37 764.72,2254.37 280.63,2274.61 326.44,2274.61
NetC4_1: C4.1 U2.6 | length 153.1
  Top Layer w9: U2.6 718.94,2444.92 C4.1
NetC5_2: C5.2 R8.2 TP1.1 U2.7 U2.8 | length 3331.9
  Top Layer w30: R8.2 413.39,566.78 390.8,589.37 39.72,589.37 4.72,624.37 4.72,1689.37 29.72,1714.37 851.3,1714.37 879.72,1742.8 879.72,2464.37 856.3,2487.8 C5.2@768.07,2487.8
NetC7_1: C7.1 U3.6 | length 156.8
  Top Layer w9: U3.6 2799.25,2257.36 C7.1
NetC8_2: C8.2 R9.2 TP3.1 U3.7 U3.8 | length 1812.8
  Top Layer w30: C8.2 3274.53,2315.55 3295.28,2294.8 R9.2
NetC10_1: C10.1 U4.6 | length 157.4
  Top Layer w9: U4.6 2927.91,3169.45 C10.1
NetC11_2: C11.2 R10.2 TP2.1 U4.7 U4.8 | length 928.4
  Top Layer w9: U4.7 U4.8 2839.25,3227.8 C11.2
  Top Layer w30: C11.2 3103.15,3227.8 3129.92,3254.57 R10.2
NetC13_1: C13.1 U5.6 | length 153.1
  Top Layer w9: U5.6 335.47,3237.64 C13.1
NetC14_2: C14.2 R11.2 TP4.1 U5.7 U5.8 | length 695.1
  Top Layer w30: R11.2 62.52,3669.29 87.8,3644.02 87.8,3432.2 117.8,3402.2 267.8,3402.2 292.6,3377.4 C14.2
NetD1_1: D1.1 P5.2 | length 2336.4
  Top Layer w25: v1(1650,2175) 1650,2057.99 P5.2
  Bottom Layer w15: D1.1@1462.79,2262.64 1462.79,2305.94 1624.06,2305.94 1650,2280 v1(1650,2175)
NetD1_2: D1.2 D2.2 P5.3 | length 3137.6
  Top Layer w25: v1(1305,2175) 1463.39,2175 P5.3
  Bottom Layer w15: v1(1305,2175) 1305,2283.98 D1.2 1305.31,2349.69 1330,2374.37 1911.46,2374.37 1935.83,2350 D2.2
NetD2_1: D2.1 P5.1 | length 2047.6
  Top Layer w25: v1(1778.35,2175) 1778.35,1999.24 P5.1
  Bottom Layer w15: v1(1778.35,2175) 1778.35,2262.64 D2.1@1778.35,2305.94
NetR1_1: R1.1 R2.2 U1.21 | length 447.4
  Top Layer w15: U1.21 1449.55,1321.52 R2.2 ; R2.2@1450,1335.04 R1.1@1450,1405.59
NetR5_1: R5.1 R6.2 U1.2 | length 339.5
  Top Layer w15: R5.1 586.83,1374.76 588.9,1372.7 U1.2
ON_1: R16.1 R17.2 TP8.1 U1.4 U2.3 | length 2477.8
  Top Layer w9: v1(485.28,2444.92) U2.3
  Top Layer w15: v1(79.45,1790) R16.1 ; TP8.1 v1(444.72,1464.37) 444.72,1337.24 460.45,1321.52 U1.4
  Bottom Layer w15: v1(444.72,1464.37) 103.42,1464.37 79.72,1488.07 79.72,2419.37 105.28,2444.92 v1(485.28,2444.92)
ON_2: R20.1 R21.2 TP9.1 U1.5 U3.3 | length 4476.6
  Top Layer w9: v1(2543.35,2257.05) 2543.66,2257.36 U3.3
  Top Layer w15: TP9.1@385,1295.93 v1(444.72,1295.93) U1.5 ; v1(2543.35,2174.37) 2543.35,1976.65 2568.9,1951.1 R21.2 R20.1
  Bottom Layer w15: v1(444.72,1295.93) 479.72,1330.93 479.72,2039.37 506.1,2065.75 2519.72,2065.75 2543.35,2089.37 v1(2543.35,2174.37) v1(2543.35,2257.05)
ON_3: R18.1 R19.2 TP10.1 U1.20 U4.3 | length 4964.9
  Top Layer w9: v1(2673.35,3169.45) U4.3
  Top Layer w15: U1.20 1011.28,1295.93 994.72,1279.37 994.72,943.62 1020.63,917.72 v1(1080.63,917.72) TP10.1 ; v1(2673.59,2874.07) R19.2 R18.1
  Bottom Layer w15: v1(1080.63,917.72) 2573.07,917.72 2673.34,1017.99 v1(2673.35,3169.45)
ON_4: R23.1 R24.2 TP11.1 U1.19 U5.3 | length 4742.9
  Top Layer w9: v1(335.47,3027.05) U5.3
  Top Layer w15: v1(54.72,2489.37) 153.46,2489.37 ; R24.2 R23.1 153.46,2706.54 175,2685 175,2510 154.37,2489.37 175.63,2468.11 175.63,1959.37 195.63,1939.37 v1(585.63,1939.37) ; U1.19 1030.69,1270.34 1019.72,1259.37 1019.72,1044.29 1039.65,1024.37 v1(1079.72,1024.37) 1115.63,1024.37 1135,1005 1135,730 1125,720 TP11.1
  Bottom Layer w15: v1(54.72,2489.37) 479.72,2489.37 504.72,2514.37 504.72,2589.37 479.72,2614.37 364.72,2614.37 335.47,2643.62 v1(335.47,3027.05) ; v1(585.63,1939.37) 585.63,1054.29 615.55,1024.37 v1(1079.72,1024.37)
RESET: P4.3 R7.1 U1.3 | length 1567.1
  Top Layer w15: P4.3@258.33,873.37 P4.3 251.51,884.37 894.72,884.37 919.72,909.37 919.72,1330.04 902.66,1347.11 ; R7.1 900,1525.04 919.72,1505.31 919.72,1364.18 902.66,1347.11 ; U1.3 902.66,1347.11
SCL: P4.1 R4.1 U1.22 | length 1669.2
  Top Layer w15: P4.1 287.62,780.88 316.1,809.37 944.72,809.37 968.25,832.89 968.25,1322.89 992.46,1347.11 U1.22 1329.29,1347.11 1357.22,1375.04 R4.1
SDA: P4.2 R3.1 U1.23 | length 1578.1
  Top Layer w15: P4.2@245.21,815 P4.2 273.86,827.13 286.1,839.37 919.72,839.37 944.72,864.37 944.72,1344.37 973.05,1372.7 U1.23 1247.66,1372.7 1267.22,1392.26 R3.1
SW1: R12.1 S1.1 U1.6 | length 1675.3
  Top Layer w15: v1(540.63,1264.37) 570.63,1264.37 583.07,1251.93 R12.1 664.65,1204.29 730.69,1270.34 U1.6
  Bottom Layer w15: S1.1 204.72,339.37 229.72,364.37 517.28,364.37 540.63,387.72 v1(540.63,1264.37)
SW2: R13.1 S2.1 U1.7 | length 5024.7
  Top Layer w15: v1(649.72,489.37) 649.72,609.29 629.65,629.37 99.72,629.37 79.72,649.37 79.72,904.37 99.72,924.37 554.72,924.37 582.52,952.16 R13.1 644.65,1109.29 780.1,1244.75 U1.7
  Bottom Layer w15: v1(649.72,489.37) 3154.72,489.37 3179.72,514.37 3179.72,719.37 3205.39,745.04 S2.1
SW3: R14.1 S3.1 U1.18 | length 5340.7
  Top Layer w15: U1.18 1269.35,1244.75 1294.84,1219.25 R14.1 v1(1204.8,1034.29)
  Bottom Layer w15: v1(1204.8,1034.29) 2599.65,1034.29 2634.72,1069.37 2634.72,1629.37 2634.72,3339.72 2670,3375 3050,3375 3075,3400 3075,3982.56 S3.1
SW4: R15.1 S4.1 U1.17 | length 5640.1
  Top Layer w15: v1(504.72,414.37) 1269.72,414.37 1294.84,439.49 R15.1 1185.71,934.29 1165,955 1165,1183.74 1129.72,1219.02 1129.72,1219.15 U1.17
  Bottom Layer w15: S4.1 -15.94,3565.04 9.72,3539.37 9.72,664.37 34.72,639.37 474.72,639.37 504.72,609.37 v1(504.72,414.37)
VBAT: C3.2 C6.2 C9.2 C12.2 P3.1 TP5.1 U2.1 U2.2 U2.4 U3.1 U3.2 U3.4 U4.1 U4.2 U4.4 U5.1 U5.2 U5.4 | length 5184.8
  Top Layer w9: C9.2 2603.07,3172.32 2625.63,3149.76
  Top Layer w15: 2329.72,2714.37 2329.72,2324.37 2348.54,2305.55 C6.2
  Top Layer w30: 369.72,3079.57 v1(454.72,3079.57) 454.72,2739.37 479.72,2714.37 2329.72,2714.37 2573.38,2714.37 2603.07,2744.06 2603.07,3172.32
  Bottom Layer w30: v1@454.72,3079.37 829.72,3079.37 859.72,3109.37 859.72,3889.37 884.72,3914.37 1079.72,3914.37 1113.35,3880.75 P3.1@1113.35,3817.05
pads on no net: MH1.1 MH2.1 MH3.1 MH4.1 P4.0 P5.0 S1.3 S1.4 S2.3 S2.4 S3.3 S3.4 S4.3 S4.4 U1.1 U1.8 U1.9 U1.10 U1.11 U1.13 U1.14 U1.15 U1.16

## Polygon pours and split planes (outlines as drawn)
GND on Top Layer "Top Layer-GND" (solid, pour order 118): 2708.34,2222.05 2644.25,2222.05 2644.25,2242.05 2708.34,2242.05
GND on Top Layer "Top Layer-GND 1" (solid, pour order 116): 2835.39,3135.04 2771.3,3135.04 2771.3,3155.04 2835.39,3155.04
GND on Top Layer "Top Layer-GND 2" (solid, pour order 114): 350.63,3105 350.63,3169.09 370.63,3169.09 370.63,3105
GND on Top Layer "Top Layer-GND 3" (solid, pour order 112): 585.63,2425.04 649.72,2425.04 649.72,2405.04 585.63,2405.04
GND on Top Layer "GND_L01_P106" (solid, pour order 106): 2925,2355 2425,2355 2425,2450 2925,2450
2V35 on Top Layer "2V35_L01_P096" (solid, pour order 96): 2150.63,2652.72 2220.63,2652.72 2220.63,1902.72 2150.63,1902.72
GND on Top Layer "GND_L01_P104" (solid, pour order 104): 3068.65,3375 3068.65,3265 2570.63,3265 2570.63,3375
GND on Top Layer "GND_L01_P102" (solid, pour order 102): 350.63,1967.72 350.63,2052.72 785.63,2052.72 785.63,1967.72
GND on Top Layer "GND_L01_P100" (solid, pour order 100): 260.63,2292.72 350.63,2292.72 350.63,1967.72 260.63,1967.72
2V35 on Top Layer "2V35_L01_P098" (solid, pour order 98): 1635.63,1292.72 1735.63,1292.72 1735.63,718.75 1635.63,718.75
VBAT on Top Layer "Top Layer-VBAT 1" (solid, pour order 89): 444.72,2464.37 444.72,2429.37 268.35,2429.37 268.35,2430.98 268.35,2464.37
VBAT on Top Layer "VBAT_L01_P087" (solid, pour order 87): 574.72,2429.37 268.35,2429.37 268.35,2409.37 574.72,2409.37
VBAT on Top Layer "VBAT_L01_P085" (solid, pour order 85): 268.35,2507.84 268.35,2689.37 359.88,2689.37 360.21,2507.84
no net on Top Layer "Top Layer-No Net 2" (solid, pour order 83): 268.35,2689.37
VBAT on Top Layer "VBAT_L01_P079" (solid, pour order 79): 574.72,2464.37 268.35,2464.37 268.35,2511.87 574.72,2511.87
no net on Top Layer "Top Layer-No Net 3" (solid, pour order 77): 768.07,2550.79
GND on Top Layer "GND_L01_P075" (solid, pour order 75): 619.72,2429.37 654.72,2429.37 654.72,2359.37 799.72,2359.37 799.72,2224.37 619.72,2224.37
NetC5_2 on Top Layer "Top Layer-NetC5_2" (solid, pour order 73): 620.63,2457.72 800.63,2457.72 800.63,2511.87 620.63,2511.87
VBAT on Top Layer "VBAT_L01_P071" (solid, pour order 71): 2573.35,3132.05 2644.72,3132.05 2644.72,2685 2573.38,2685
VBAT on Top Layer "Top Layer-VBAT 2" (solid, pour order 69): 472.44,2745 2629.72,2745 2629.72,2685 472.44,2685
VBAT on Top Layer "VBAT_L01_P063" (solid, pour order 63): 2379.72,2332.05 2319.72,2332.05 2319.72,2739.37 2379.72,2739.37
VBAT on Top Layer "VBAT_L01_P044" (solid, pour order 44): 2319.72,2332.05 2633.35,2332.05 2633.35,2272.05 2319.72,2272.05
VBAT on Top Layer "Top Layer-VBAT" (solid, pour order 6): 2573.35,3247.05 2763.35,3247.05 2763.35,3184.61 2573.35,3184.61
GND on Top Layer "GND_L01_P061" (solid, pour order 61): 2425,3889.37 2425,3744.37 214.72,3744.37 214.72,3889.37
VBAT on Top Layer "VBAT_L01_P060" (solid, pour order 60): 350.73,2689.37 318.35,2689.37 318.35,2962.05 351.37,2962.05
VBAT on Top Layer "VBAT_L01_P058" (solid, pour order 58): 350.63,3097.05 479.72,3097.05 479.72,2685 350.63,2685
VBAT on Top Layer "VBAT_L01_P056" (solid, pour order 56): 268.35,2689.37 268.35,3097.05 318.35,3097.05 318.35,2689.37
GND on Top Layer "GND_L01_P054" (solid, pour order 54): 423.35,3748.14 423.35,3137.05 478.35,3137.05 478.35,3748.14
GND on Top Layer "GND_L01_P052" (solid, pour order 52): 350.63,3137.05 350.63,3177.05 423.35,3177.05 423.35,3137.05
NetC14_2 on Top Layer "NETC14_2_L01_P050" (solid, pour order 50): 268.35,3317.05 268.35,3137.05 321.1,3137.05 321.1,3317.05
VBAT on Top Layer "VBAT_L01_P046" (solid, pour order 46): 2633.35,2237.68 2319.72,2237.68 2319.72,2222.05 2633.35,2222.05
VBAT on Top Layer "VBAT_L01_P016" (solid, pour order 16): 2573.35,3197.05 2644.72,3197.05 2644.72,3152.05 2763.35,3152.05 2763.35,3132.05 2573.35,3132.05
VBAT on Top Layer "VBAT_L01_P048" (solid, pour order 48): 2319.72,2272.05 2508.35,2272.05 2508.35,2237.05 2319.72,2237.05
GND on Top Layer "GND_L01_P042" (solid, pour order 42): 2673.35,2187.05 2673.35,2242.05 2708.35,2242.05 2708.35,2187.05 2708.34,2187.05
GND on Top Layer "GND_L01_P040" (solid, pour order 40): 2925,2132.05 2925,2187.05 2673.35,2187.05 2673.35,2132.05
NetC8_2 on Top Layer "NETC8_2_L01_P038" (solid, pour order 38): 2673.35,2272.05 2673.35,2292.05 2709.25,2292.05 2709.25,2272.05
NetC8_2 on Top Layer "Top Layer-NetC8_2" (solid, pour order 36): 2863.35,2342.05 2673.35,2342.05 2673.35,2272.05 2863.35,2272.05
NetC11_2 on Top Layer "NETC11_2_L01_P032" (solid, pour order 32): 2838.35,3184.61 2803.35,3184.61 2803.35,3202.05 2838.34,3202.05
no net on Top Layer "Top Layer-No Net 4" (solid, pour order 30): 2813.35,3117.05
GND on Top Layer "GND_L01_P028" (solid, pour order 28): 2838.34,3095.12 2838.35,3155.12 2803.35,3155.12 2803.35,3095.12
GND on Top Layer "Bottom Layer-No Net 1" (solid, pour order 20): 2993.35,3097.05 2803.35,3097.05 2803.35,3042.05 2993.35,3042.05
no net on Top Layer "Top Layer-No Net 1" (solid, pour order 4): 2573.35,3247.05
no net on Top Layer "Top Layer-No Net" (solid, pour order 12): 2993.35,3252.05
NetC11_2 on Top Layer "NETC11_2_L01_P014" (solid, pour order 14): 2993.35,3252.05 2803.35,3252.05 2803.35,3184.61 2993.35,3184.61
2V35 on Bottom Layer "2V35_L02_P090" (solid, pour order 90): 2665.63,2132.72 3195.63,1602.72 3195.63,557.72 45.63,557.72 45.63,1597.72 580.63,2132.72
2V35 on Bottom Layer "2V35_L02_P094" (solid, pour order 94): 2230.63,2577.72 2150.63,2577.72 2150.63,2652.72 2230.63,2652.72
2V35 on Bottom Layer "2V35_L02_P092" (solid, pour order 92): 2225.85,3887.72 2300.85,3887.72 2300.85,2577.72 2225.85,2577.72
VBAT on Bottom Layer "VBAT_L02_P067" (solid, pour order 67): 904.72,3039.37 904.72,3714.37 404.72,3714.37 404.72,3039.37
VBAT on Bottom Layer "VBAT_L02_P065" (solid, pour order 65): 1154.72,3964.37 404.72,3964.37 404.72,3714.37 1154.72,3714.37

## Silkscreen, mask and mechanical layers (free items; w line width, h text height)
Top Overlay:
  text "VBAT" at 999.72,3909.37 h39.37
  text "3V3" at 1953.35,3909.37 h39.37
  text "SOLAR" at 2119.72,3909.37 h39.37
  text "GND" at 2460,3510 h39.37
  text "VR4" at 20,3385 h39.37
  text "VR3" at 3110,3210 h39.37
  text "R" at 510,3205 h39.37
  text "K" at 2870,3035.87 h39.37
  text "VBAT" at 710,2695 h39.37
  text "I" at 377.95,2390 h39.37
  text "VR2" at 3090,2296.73 h39.37
  text "u" at 1365,2140 h787.4
  text "LA UNIVERSIDAD DEL VALLE DE GUATEMALA / AGRADECE ESPECIALMENTE A:" at 1705,1930 h33.46
  text "S" at -65,1755 h39.37
  text "VR1" at 255,1695 h39.37
  text "ON1" at 365,1445 h39.37
  text "ON2" at 240,1280 h39.37
  text "UNOOSA / JAXA / UK SPACE AGENCY / ASTROSAT / SEGUROS UNIVERSALES S.A. / INTERNATIONAL CENTRE FOR THEORETICAL PHYSICS  / PRENSA LIBRE / AULA / GRUPO SSC / ANSYS / SIT GUATEMALA / CRAG GUATEMALA / CLARO GUATEMALA / SPG / ERA&RELMO / MOUNTZ / FABIOLA MORALES DE RIOS" at 1705,1090 h25.59
  text "A" at 1535,840 h39.37
  text "ON3" at 1125,775 h39.37
  text "SUN SENSORS" at 2250.63,722.72 h39.37
  text "I2C" at 525.63,701.65 h39.37
  text "ON4" at 1125,701.65 h39.37
  text "Z-" at 1975,680 h118.11
  text "A TODOS LOS MIEMBROS DE LA COMUNIDAD UVG" at 1705,645 h33.46
  text "P/N: PT-MIS-PCB-004" at 1285,294.53 h100
Bottom Overlay:
  text "QUETZAL-1" at 1934.72,3940 h78.74
  text "u" at 3155.63,2572.72 h1181.1
  text "HECHO EN GUATEMALA" at 2305,275 h78.74
Mechanical Drawing:
  drawing of 236 lines, arcs and shapes, not listed
  text "Mechanical Drawing of PT-MIS-PCB-004_v1" at 415,4400 h60
  text "Units: mm" at -1265,-295 h60
  text "Scale: 1:1" at -1265,-395 h60
Board Outline:
  drawing of 180 lines, arcs and shapes, not listed
ASM Top:
  text "Assembly TOP of PT-MIS-PCB-004_v1" at 600,4200 h60
ASM Bottom:
  text "Assembly BOTTOM of PT-MIS-PCB-004_v1" at 2610,4300 h60

## Dimensions
3169.29,4053.15 to 3228.35,4053.15 on Mechanical Drawing
3228.35,4131.89 to 3228.35,4053.15 on Mechanical Drawing
-188.98,1297.24 to 3417.32,1297.24 on Mechanical Drawing
-188.98,1297.24 to -188.98,3009.84 on Mechanical Drawing
-188.98,1297.24 to 0,0 on Mechanical Drawing
-295.28,539.37 to 0,539.37 on Mechanical Drawing
-539.37,3767.72 to 0,4122.05 on Mechanical Drawing
-539.37,3295.28 to -539.37,3767.72 on Mechanical Drawing
-295.28,539.37 to -295.28,3295.28 on Mechanical Drawing
0,0 to 0,539.37 on Mechanical Drawing
3228.35,185.04 to 3767.72,539.37 on Mechanical Drawing
472.44,0 to 3228.35,185.04 on Mechanical Drawing
0,0 to 472.44,0 on Mechanical Drawing